# EAGLE board LabPower-FB_V2 (EAGLE 7.7.0)
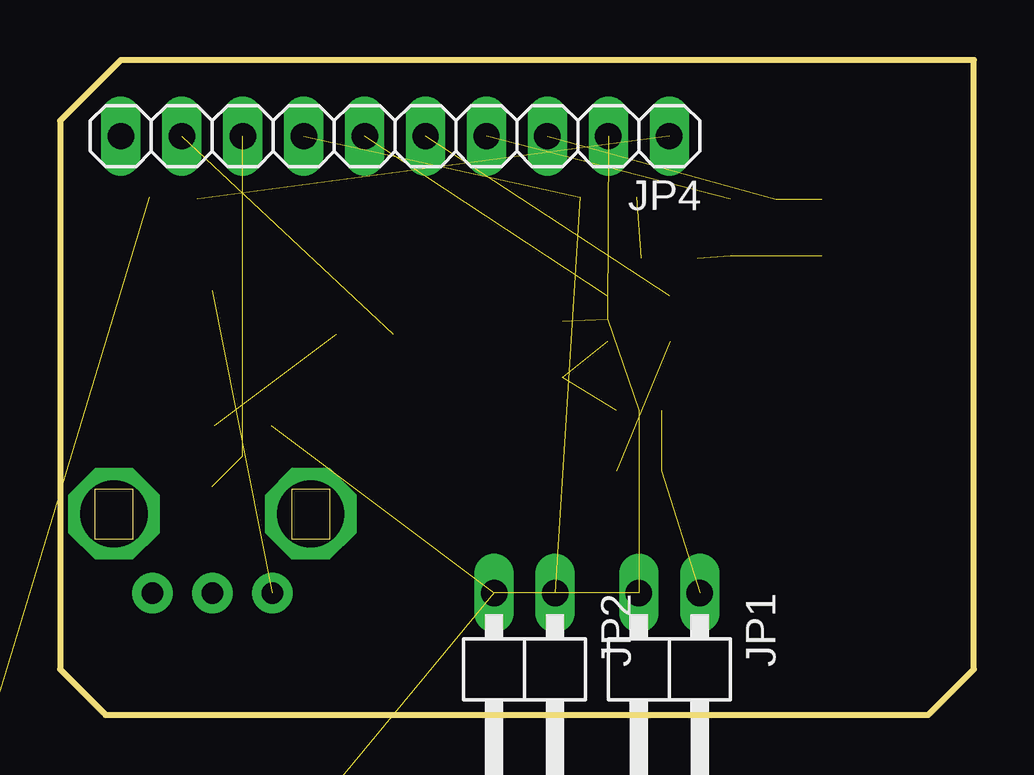
[diagram p0: board, top side]
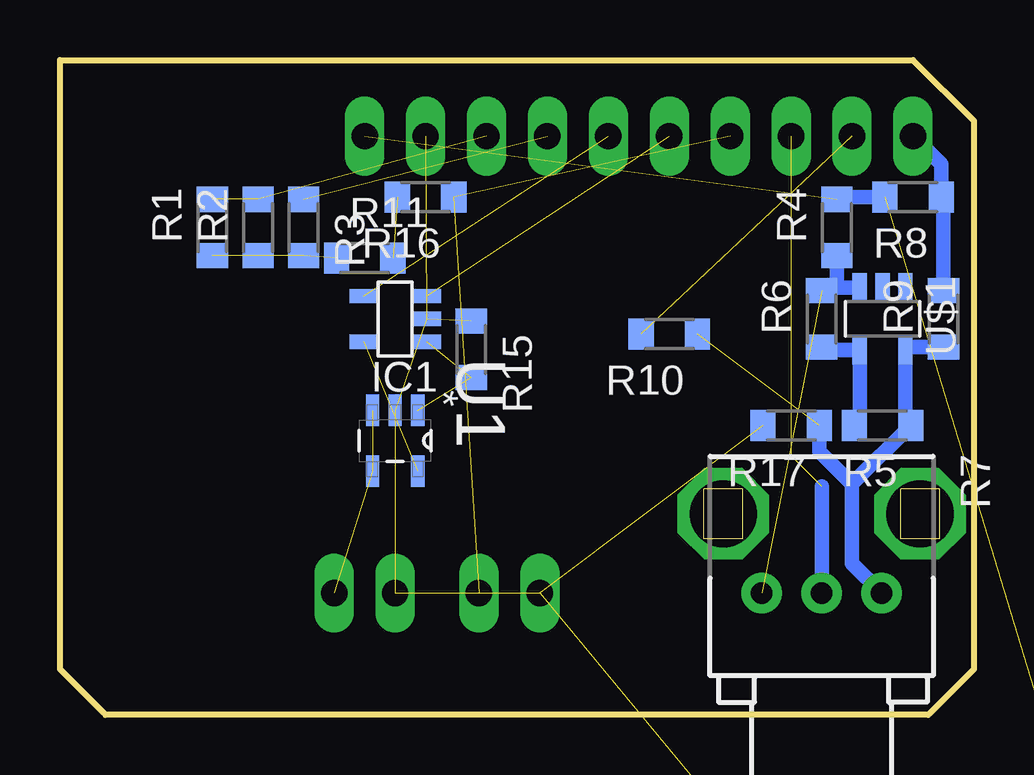
[diagram p1: board, bottom side, seen from below]

Size 38.1 x 27.31 mm. Coordinates in mm from the lower left corner, seen from the top.
Outline: 38.1,27.31 2.54,27.31 0,24.77 0,1.91 1.91,0 36.2,0 38.1,1.91 38.1,27.31
Copper layers (1*16): Top 0.035mm / dielectric 1.5mm / Bottom 0.035mm
Design rules "default *": minimum track width 10mil, minimum drill 24mil, track to track 8mil, track to pad 8mil, pad to pad 8mil, via to via 8mil, smd to smd 8mil, copper to edge 40mil, drill to drill 8mil, minimum pad ring 10mil, minimum via ring 8mil, stop-mask expansion 4mil, vias tented up to drill 0mil, thermal gap 10mil
Net classes: 0 default: clearance 0.205 mm

## Footprints (pad centres in the part's own frame; a part is rotated, then mirrored left to right if it is on the bottom)
SOT23-5 = smd 0.6 x 1.2: 1 -0.95,-1.306; 2 0,-1.306; 3 0.95,-1.306; 4 0.95,1.306; 5 -0.95,1.306
SOT25 = smd 0.55 x 1.2: 1 -0.95,-1.3; 2 0,-1.3; 3 0.95,-1.3; 4 0.95,1.3; 5 -0.95,1.3
1X02/90 = drill 1.1 pad 1.422 long: 1 -1.27,-3.81; 2 1.27,-3.81
1X10 = drill 1.1 long: 1 -11.43,0; 2 -8.89,0; 3 -6.35,0; 4 -3.81,0; 5 -1.27,0; 6 1.27,0; 7 3.81,0; 8 6.35,0; 9 8.89,0; 10 11.43,0
R0805 = smd 1.05 x 1.3: 1 -1.175,0; 2 1.175,0
EVUE = drill 0.9 pad 1.676: 1 0,-2.5; 2 0,0; 3 0,2.5 | drill 2.8 octagon: M1 -3.3,4.1; M2 -3.3,-4.1
SOT95P280X145-5N = smd 1.321 x 0.559: 1 -1.27,0.94; 2 -1.27,0; 3 -1.27,-0.94; 4 1.27,-0.94; 5 1.27,0.94
SOT23-5' = smd 0.6 x 1.2: + 0,-2.576; A -0.95,0.036; C 0.95,-2.576; NC -0.95,-2.576; R 0.95,0.036

## Placement (x,y rotation side)
IC1  INA168  [SOT23-5]  24.13,16.51 90 bottom
IC3  LD2985BM50R  [SOT25]  -13.97,-32.38 0 top  (outside the outline)
JP1  [1X02/90]  25.4,1.27 180 top
JP2  [1X02/90]  19.37,1.27 180 top
JP4  [1X10]  13.97,24.13 180 top
R1  9K1  [R0805]  31.75,20.32 90 bottom
R2  820K  [R0805]  29.84,20.32 90 bottom
R3  1K  [R0805]  27.94,20.32 270 bottom
R4  1K  [R0805]  5.71,20.32 90 bottom
R5  1K  [R0805]  3.81,12.07 180 bottom
R6  330R  [R0805]  6.35,16.51 90 bottom
R7  EVUE20  [EVUE]  6.35,5.08 270 bottom
R8  2K  [R0805]  2.54,21.59 180 bottom
R9  1K  [R0805]  1.27,16.51 90 bottom
R10  1K  [R0805]  12.7,15.88 180 bottom
R11  0  [R0805]  25.4,19.05 0 bottom
R15  33K  [R0805]  20.95,15.24 270 bottom
R16  0  [R0805]  22.86,21.59 180 bottom
R17  0  [R0805]  7.62,12.07 180 bottom
U1  TSV621ILT  [SOT95P280X145-5N]  24.13,11.43 270 bottom
U$1  TL431-IDBVR  [SOT23-5']  3.81,15.24 180 bottom

## Library data of the parts
IC1 = burr-brown; MF: TEXAS INSTRUMENTS; MPN: INA168NA/250; OC_FARNELL: 4375737; OC_NEWARK: 35C1744
IC3 = v-reg
JP1 JP2 JP4 = pinhead
R1-R6 R8-R11 R15-R17 = rcl
R7 = pot
U1 = ST Microelctronics_By_element14_Batch_1; MPN: TSV621ILT; OC_FARNELL: 1737213; OC_NEWARK: 26R7211; PACKAGE: SOT-23-5; SUPPLIER: STMICROELECTRONICS
U$1 = TL431

## Nets
+5V: IC3.5
+12V: IC3.1 IC3.3 JP4.1 R4.2 R8.2
+I-FB: JP4.9 R10.2
+V-FB: JP2.1 JP4.7 R16.1
-I-FB: JP4.10 R8.1 R9.2
-V-FB: JP4.8 R7.2
C-IN+: IC1.3 JP4.6
C-IN-: IC1.4 JP4.5
GND: IC1.2 IC3.2 JP1.2 JP2.2 JP4.2 R15.1 R17.2 U1.2
N$1: R4.1 R6.2 R7.1 U$1.C
N$2: R5.2 R6.1 U$1.R
N$3: R1.1 R2.1 R3.2 R11.1
N$4: R11.2 R16.2
N$7: JP1.1 U1.3 U1.4
N$8: IC1.1 R15.2 U1.1
N$10: R5.1 R7.3 R9.1 R10.1 R17.1 U$1.A
N$11: IC1.5 U1.5
V-IN+: JP4.3 R1.2 R2.2
V-IN-: JP4.4 R3.1

## Tracks (layer width: path | path; a pad name or v marks a point on that pad's centre or on a via)
+12V  (3 unrouted)
  Bottom 0.61: R8.2 5.62,21.59 R4.2
+I-FB  (1 unrouted)
+V-FB  (2 unrouted)
-I-FB
  Bottom 0.61: R9.2 1.27,21.5 R8.1 1.37,22.96 JP4.10
-V-FB  (2 unrouted)
  Bottom 0.61: R7.2 6.35,9.53
C-IN+  (1 unrouted)
C-IN-  (1 unrouted)
GND  (7 unrouted)
N$1  (1 unrouted)
  Bottom 0.61: U$1.C 5.58,17.82 | 5.58,17.82 R6.2 | R4.1 5.71,17.95 5.58,17.82
N$2
  Bottom 0.61: R6.1 5.58,15.2 U$1.R 4.76,12.29 R5.2
N$3  (3 unrouted)
N$4  (1 unrouted)
N$7  (2 unrouted)
N$8  (2 unrouted)
N$10  (1 unrouted)
  Bottom 0.61: 5.08,9.62 5.08,6.31 R7.3 | 5.08,9.62 R5.1 2.86,12.29 U$1.A 2.73,15.34 R9.1 | 5.08,9.62 6.45,10.99 R17.1
N$11  (1 unrouted)
V-IN+  (2 unrouted)
V-IN-  (1 unrouted)